# EAGLE board CT_schematic (EAGLE 7.6.0)

Size 100 x 80 mm. Coordinates in mm from the lower left corner, seen from the top.
Outline: 0,0 100,0 100,80 0,80 0,0
Copper layers (1*16): Top 0.035mm / dielectric 1.5mm / Bottom 0.035mm
Design rules "default": minimum track width 10mil, minimum drill 24mil, track to track 8mil, track to pad 8mil, pad to pad 8mil, via to via 8mil, smd to smd 8mil, copper to edge 40mil, drill to drill 8mil, minimum pad ring 10mil, minimum via ring 8mil, stop-mask expansion 4mil, vias tented up to drill 0mil, thermal gap 10mil

## Footprints (pad centres in the part's own frame; a part is rotated, then mirrored left to right if it is on the bottom)
C0603 = smd 0.8 x 0.8: 1 -0.762,0; 2 0.762,0
C0402 = smd 0.5 x 0.5: 1 -0.508,0; 2 0.508,0
C1210 = smd 1.2 x 2.5: 1 -1.524,0; 2 1.524,0
C1206 = smd 1.3 x 1.6: 1 -1.524,0; 2 1.524,0
EXV-9H = smd 3.505 x 1.676: 1 -2.857,0; 2 2.857,0
L0603 = smd 0.8 x 0.8: 1 -0.762,0; 2 0.762,0
PJ-037B_PACKAGE = drill 3.7 square: 1 12,0 | drill 3.2 square: 2 6,0
R0603 = smd 0.8 x 0.8: 1 -0.762,0; 2 0.762,0
LQFP48 = smd 0.3 x 1.2: 1 -2.75,-4.25; 2 -2.25,-4.25; 3 -1.75,-4.25; 4 -1.25,-4.25; 5 -0.75,-4.25; 6 -0.25,-4.25; 7 0.25,-4.25; 8 0.75,-4.25; 9 1.25,-4.25; 10 1.75,-4.25; 11 2.25,-4.25; 12 2.75,-4.25; 25 2.75,4.25; 26 2.25,4.25; 27 1.75,4.25; 28 1.25,4.25; 29 0.75,4.25; 30 0.25,4.25; 31 -0.25,4.25; 32 -0.75,4.25; 33 -1.25,4.25; 34 -1.75,4.25; 35 -2.25,4.25; 36 -2.75,4.25 | smd 1.2 x 0.3: 13 4.25,-2.75; 14 4.25,-2.25; 15 4.25,-1.75; 16 4.25,-1.25; 17 4.25,-0.75; 18 4.25,-0.25; 19 4.25,0.25; 20 4.25,0.75; 21 4.25,1.25; 22 4.25,1.75; 23 4.25,2.25; 24 4.25,2.75; 37 -4.25,2.75; 38 -4.25,2.25; 39 -4.25,1.75; 40 -4.25,1.25; 41 -4.25,0.75; 42 -4.25,0.25; 43 -4.25,-0.25; 44 -4.25,-0.75; 45 -4.25,-1.25; 46 -4.25,-1.75; 47 -4.25,-2.25; 48 -4.25,-2.75
LGA63S127P16X13_2050X1750X150 = smd 0.9 x 0.9: 1 -9.525,-8.05; 2 -8.255,-8.05; 3 -6.985,-8.05; 4 -5.715,-8.05; 5 -4.445,-8.05; 6 -3.175,-8.05; 7 -1.905,-8.05; 8 -0.635,-8.05; 9 0.635,-8.05; 10 1.905,-8.05; 11 3.175,-8.05; 12 4.445,-8.05; 13 5.715,-8.05; 14 6.985,-8.05; 15 8.255,-8.05; 16 9.525,-8.05; 17 9.525,-6.35; 18 9.525,-5.08; 19 9.525,-3.81; 20 9.525,-2.54; 21 9.525,-1.27; 22 9.525,0; 23 9.525,1.27; 24 9.525,2.54; 25 9.525,3.81; 26 9.525,5.08; 27 9.525,6.35; 28 9.525,8.05; 29 8.255,8.05; 30 6.985,8.05; 31 5.715,8.05; 32 4.445,8.05; 33 3.175,8.05; 34 1.905,8.05; 35 0.635,8.05; 36 -0.635,8.05; 37 -1.905,8.05; 38 -3.175,8.05; 39 -4.445,8.05; 40 -5.715,8.05; 41 -6.985,8.05; 42 -8.255,8.05; 43 -9.525,8.05; 44 -9.525,6.35; 45 -9.525,5.08; 46 -9.525,3.81; 47 -9.525,2.54; 48 -9.525,1.27; 49 -9.525,0; 50 -9.525,-1.27; 51 -9.525,-2.54; 52 -9.525,-3.81; 53 -9.525,-5.08; 54 -9.525,-6.35 | smd 2.2 x 2.2: 55 -4.5,-4.5; 56 -1.5,-4.5; 57 1.5,-4.5; 58 -4.5,-1.5; 59 -1.5,-1.5; 60 1.5,-1.5; 61 -4.5,1.5; 62 -1.5,1.5; 63 1.5,1.5
COAXIAL_C = smd 1 x 1: 1 0,-1.5; 2 0,1.5 | smd 1.05 x 2.2: 3 -1.475,0; 4 1.475,0
SAMTEC_FTSH-105-01-L-DV-K = smd 0.762 x 2.794: 1 -2.54,-2.032; 2 -2.54,2.032; 3 -1.27,-2.032; 4 -1.27,2.032; 5 0,-2.032; 6 0,2.032; 7 1.27,-2.032; 8 1.27,2.032; 9 2.54,-2.032; 10 2.54,2.032
ABS07-32.768KHZ-7-T = smd 1.1 x 2.4: 1 -2.5,0; 2 0,0
ASFL1 = smd 1.7 x 1.5: 1 -1.27,-1.1; 2 1.27,-1.1; 3 1.27,1.1; 4 -1.27,1.1
WSON-8 = smd 0.3 x 0.6: 1 -0.75,0; 2 0.05,0; 3 0.85,0; 4 1.65,0; 5 1.65,3.8; 6 0.85,3.8; 7 0.05,3.8; 8 -0.75,3.8 | smd 3 x 2.6: PAD 0.45,1.9
SON-6 = smd 0.55 x 0.3: 1 -0.355,0.5 | smd 0.52 x 0.3: 2 -0.37,0; 3 -0.37,-0.5; 4 0.37,-0.5; 5 0.37,0; 6 0.37,0.5
SW_4-1437565-2 = smd 1.4 x 2.1: 1 -2.23,4.55; 2 -2.23,-4.55; 3 2.23,4.55; 4 2.23,-4.55
LGM67K-G1J2-24-Z = smd 0.8 x 1.4: A -2,0; C 0,0
NC7SZ125M5X = smd 1.3 x 0.7: 1 -1.3,0.95; 2 -1.3,0; 3 -1.3,-0.95; 4 1.3,-0.95; 5 1.3,0.95

## Placement (x,y rotation side)
C1  1e-06  [C0603]  -43.18,62.23 0 top  (outside the outline)
C2  1e-07  [C0603]  -46.99,62.23 0 top  (outside the outline)
C3  1e-07  [C0603]  -50.8,62.23 0 top  (outside the outline)
C4  1e-07  [C0603]  -54.61,62.23 0 top  (outside the outline)
C5  4.7e-06  [C0603]  -39.37,62.23 0 top  (outside the outline)
C6  1e-07  [C0603]  -58.42,62.23 0 top  (outside the outline)
C7  1e-08  [C0603]  -62.23,62.23 0 top  (outside the outline)
C8  1e-06  [C0603]  -66.04,62.23 0 top  (outside the outline)
C9  1e-11  [C0402]  -62.23,67.31 0 top  (outside the outline)
C10  1e-11  [C0402]  -66.04,67.31 0 top  (outside the outline)
C11  1e-12  [C0402]  -69.85,67.31 0 top  (outside the outline)
C12  2.2e-05  [C1210]  -59.69,49.53 0 top  (outside the outline)
C13  1e-07  [C0402]  -15.24,72.39 0 top  (outside the outline)
C14  1e-07  [C0402]  -19.05,72.39 0 top  (outside the outline)
C15  1e-07  [C0402]  -22.86,72.39 0 top  (outside the outline)
C16  1e-08  [C0402]  -26.67,72.39 0 top  (outside the outline)
C17  1e-08  [C0402]  -30.48,72.39 0 top  (outside the outline)
C18  1e-05  [C1206]  -16.51,55.88 0 top  (outside the outline)
C19  1e-05  [C1210]  -66.04,49.53 0 top  (outside the outline)
C20  1e-07  [C0402]  -34.29,72.39 0 top  (outside the outline)
C21  0.0001  [EXV-9H]  -66.04,40.64 0 top  (outside the outline)
C22  0.0001  [EXV-9H]  -17.78,49.53 0 top  (outside the outline)
C23  1e-08  [C0402]  -38.1,72.39 0 top  (outside the outline)
C24  1e-08  [C0402]  -41.91,72.39 0 top  (outside the outline)
C25  1e-08  [C0402]  -45.72,72.39 0 top  (outside the outline)
F1  240.0  [L0603]  -69.85,62.23 0 top  (outside the outline)
I1  3.6e-09  [C0402]  -58.42,67.31 0 top  (outside the outline)
J1  PJ-037B  [PJ-037B_PACKAGE]  -27.94,29.21 0 top  (outside the outline)
R1  10000.0  [R0603]  -60.96,55.88 0 top  (outside the outline)
R2  1000.0  [R0603]  -15.24,67.31 0 top  (outside the outline)
R3  1600.5  [R0603]  -19.05,67.31 0 top  (outside the outline)
R4  4700.0  [R0603]  -22.86,67.31 0 top  (outside the outline)
R5  4700.0  [R0603]  -26.67,67.31 0 top  (outside the outline)
R6  2200.0  [R0603]  -30.48,67.31 0 top  (outside the outline)
R7  2200.0  [R0603]  -34.29,67.31 0 top  (outside the outline)
R8  10000.0  [R0603]  -66.04,55.88 0 top  (outside the outline)
R9  100000.0  [R0603]  -40.64,55.88 0 top  (outside the outline)
R10  2700.0  [R0603]  -38.1,67.31 0 top  (outside the outline)
R11  10000.0  [R0603]  -15.24,62.23 0 top  (outside the outline)
R12  10000.0  [R0603]  -20.32,62.23 0 top  (outside the outline)
R13  10000.0  [R0603]  -25.4,62.23 0 top  (outside the outline)
R14  5.0  [R0603]  -41.91,67.31 0 top  (outside the outline)
R15  100000.0  [R0603]  -45.72,55.88 0 top  (outside the outline)
R16  2231.0  [R0603]  -45.72,67.31 0 top  (outside the outline)
R17  1000.0  [R0603]  -49.53,67.31 0 top  (outside the outline)
R18  10000.0  [R0603]  -30.48,62.23 0 top  (outside the outline)
R19  10000.0  [R0603]  -35.56,62.23 0 top  (outside the outline)
R20  9100.0  [R0603]  -53.34,67.31 0 top  (outside the outline)
R21  680000.0  [R0603]  -50.8,55.88 0 top  (outside the outline)
R22  120000.0  [R0603]  -55.88,55.88 0 top  (outside the outline)
U1  stm32f051c4t7  [LQFP48]  -58.42,27.94 0 top  (outside the outline)
U2  CC3200MODR1M2AMOBT  [LGA63S127P16X13_2050X1750X150]  -25.4,11.43 0 top  (outside the outline)
U3  73412-0114  [COAXIAL_C]  -58.42,40.64 0 top  (outside the outline)
U4  FTSH-105-01-L-DV-K  [SAMTEC_FTSH-105-01-L-DV-K]  -60.96,7.62 0 top  (outside the outline)
U5  ABS07-32.768KHZ-7-T  [ABS07-32.768KHZ-7-T]  -39.37,49.53 0 top  (outside the outline)
U6  ASFL1-25MHZ-NCS  [ASFL1]  -46.99,40.64 0 top  (outside the outline)
U7  LP3878SDX-ADJ/NOPB  [WSON-8]  -30.48,39.37 0 top  (outside the outline)
U8  TPS3895ADRYR  [SON-6]  -48.26,71.12 0 top  (outside the outline)
U9  4-1437565-2  [SW_4-1437565-2]  -44.45,29.21 0 top  (outside the outline)
U10  Q65110A2395  [LGM67K-G1J2-24-Z]  -48.26,49.53 0 top  (outside the outline)
U11  nc7sz125m5x  [NC7SZ125M5X]  -21.59,55.88 0 top  (outside the outline)
U12  nc7sz125m5x  [NC7SZ125M5X]  -27.94,55.88 0 top  (outside the outline)
U13  nc7sz125m5x  [NC7SZ125M5X]  -34.29,55.88 0 top  (outside the outline)

## Library data of the parts
C1-C25 F1 I1 J1 R1-R22 U1-U13 = circuit_tree

## Nets
CLK_CRYSTAL_U1_3: C9.1 U1.3 U5.1
CLK_CRYSTAL_U1_4: C10.1 U1.4 U5.2
CLK_U1_5: U1.5 U6.3
GND: C1.2 C2.2 C3.2 C4.2 C5.2 C6.2 C7.2 C8.2 C9.2 C10.2 C11.2 C12.2 C13.2 C14.2 C15.2 C16.2 C17.2 C18.2 C19.2 C20.2 C21.2 C22.2 C23.2 C24.2 C25.2 J1.2 R2.2 R8.2 R9.2 R10.2 R14.2 R17.2 R20.2 R22.2 U1.8 U1.23 U1.47 U2.1 U2.2 U2.16 U2.27 U2.28 U2.30 U2.32 U2.38 U2.43 U2.55 U2.56 U2.57 U2.58 U2.59 U2.60 U2.61 U2.62 U2.63 U3.1 U3.2 U3.3 U3.4 U4.3 U4.5 U6.2 U7.3 U7.PAD U8.2 U10.C U11.2 U11.3 U12.1 U12.3 U13.1 U13.3
NET_U1_7: R5.1 U1.7 U13.4
NET_U1_9: C7.1 C8.1 F1.1 U1.9
NET_U1_42: R6.1 U1.42 U2.3
NET_U1_43: R7.1 U1.43 U2.4
NET_U1_44: R8.1 U1.44
NET_U1_45: R3.1 U1.45 U10.A
NET_U1_46: R1.1 U1.46 U9.3 U9.4
NET_U2_21: R9.1 U2.21
NET_U2_23: R10.1 U2.23
NET_U2_35: R4.1 U2.35 U12.4
NET_U3_1: C11.1 I1.1 U3.1
NET_U3_31: I1.2
NET_U4_4: R12.1 U4.4
NET_U4_9: R14.1 U4.9
NET_U7_1: C17.1 U7.1
NET_U7_6: R16.2 R17.1 U7.6
NET_U7_8: R15.1 U7.8
NET_U8_1: R19.1 R20.1 U8.1
NET_U8_3: R21.2 R22.1 U8.3
NET_U8_4: R18.1 U8.4 U11.4 U12.2 U13.2
NET_U9_1: R2.1 U9.1 U9.2
PROC_SYS_SWDIO: R13.1 U1.34 U4.2
RST_OUT_U4_JTAG_RST_B: R11.1 U4.10 U11.1
VCC_S1_6V9: C18.1 C21.1 C22.1 J1.1 R15.2 U7.4
VCC_TIER1_3V3: C1.1 C2.1 C3.1 C4.1 C5.1 C6.1 C12.1 C13.1 C14.1 C15.1 C16.1 C19.1 C20.1 C23.1 C24.1 C25.1 F1.2 R1.2 R3.2 R4.2 R5.2 R6.2 R7.2 R11.2 R12.2 R13.2 R16.1 R18.2 R19.2 R21.1 U1.1 U1.24 U1.48 U2.36 U2.37 U2.40 U4.1 U6.4 U7.5 U8.6 U11.5 U12.5 U13.5

## Tracks (layer width: path | path; a pad name or v marks a point on that pad's centre or on a via)
CLK_CRYSTAL_U1_3  (2 unrouted)
CLK_CRYSTAL_U1_4  (2 unrouted)
CLK_U1_5  (1 unrouted)
GND  (71 unrouted)
NET_U1_7  (2 unrouted)
NET_U1_9  (3 unrouted)
NET_U1_42  (2 unrouted)
NET_U1_43  (2 unrouted)
NET_U1_44  (1 unrouted)
NET_U1_45  (2 unrouted)
NET_U1_46  (3 unrouted)
NET_U2_21  (1 unrouted)
NET_U2_23  (1 unrouted)
NET_U2_35  (2 unrouted)
NET_U3_1  (2 unrouted)
NET_U4_4  (1 unrouted)
NET_U4_9  (1 unrouted)
NET_U7_1  (1 unrouted)
NET_U7_6  (2 unrouted)
NET_U7_8  (1 unrouted)
NET_U8_1  (2 unrouted)
NET_U8_3  (2 unrouted)
NET_U8_4  (4 unrouted)
NET_U9_1  (2 unrouted)
PROC_SYS_SWDIO  (2 unrouted)
RST_OUT_U4_JTAG_RST_B  (2 unrouted)
VCC_S1_6V9  (5 unrouted)
VCC_TIER1_3V3  (42 unrouted)